# EAGLE board commadorable64-22-v1 (EAGLE 6.5.0)
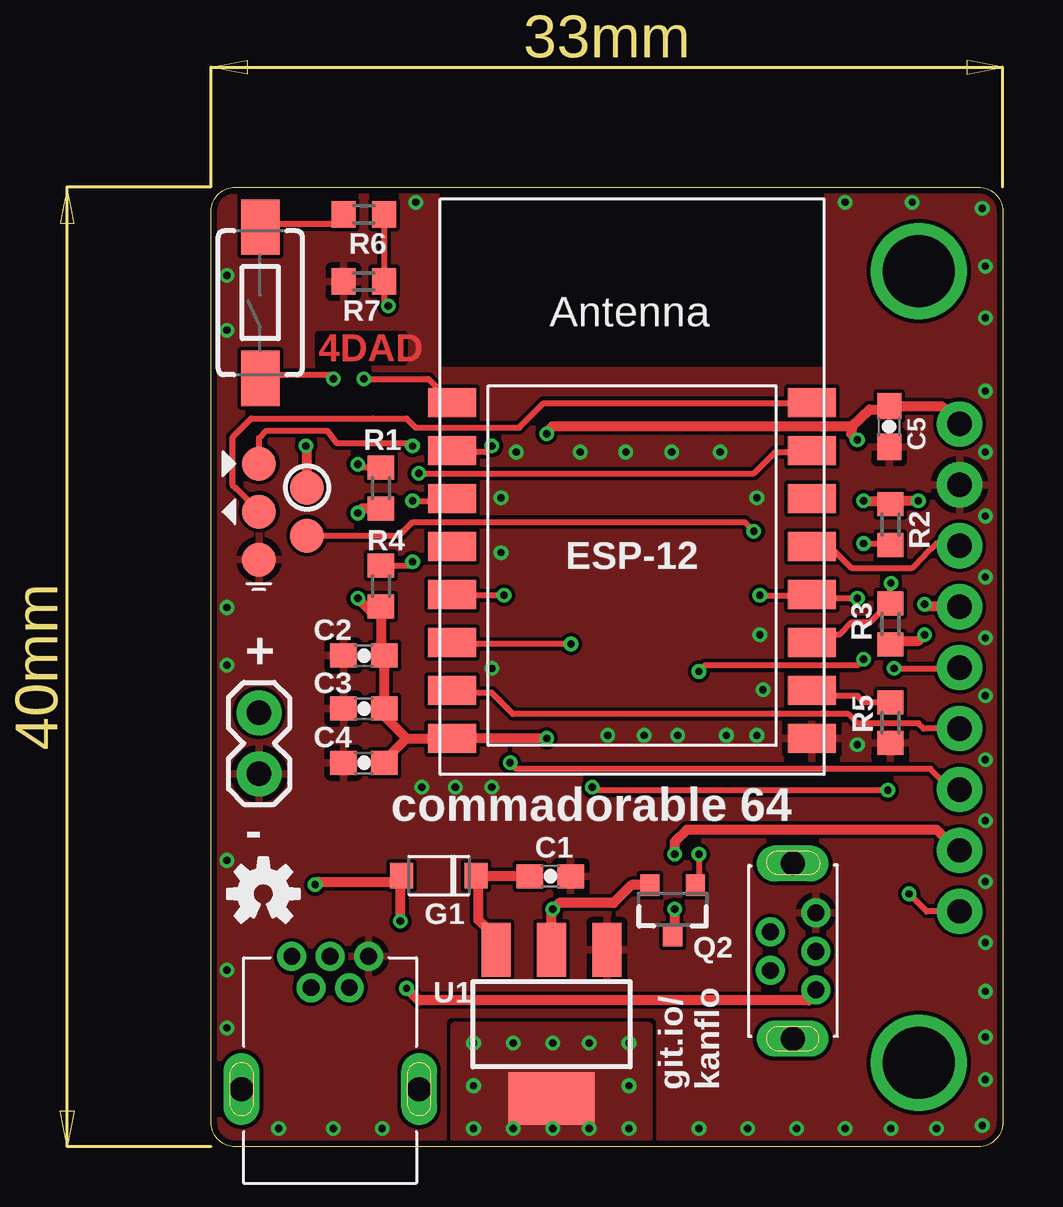
[diagram p0: board, top side]
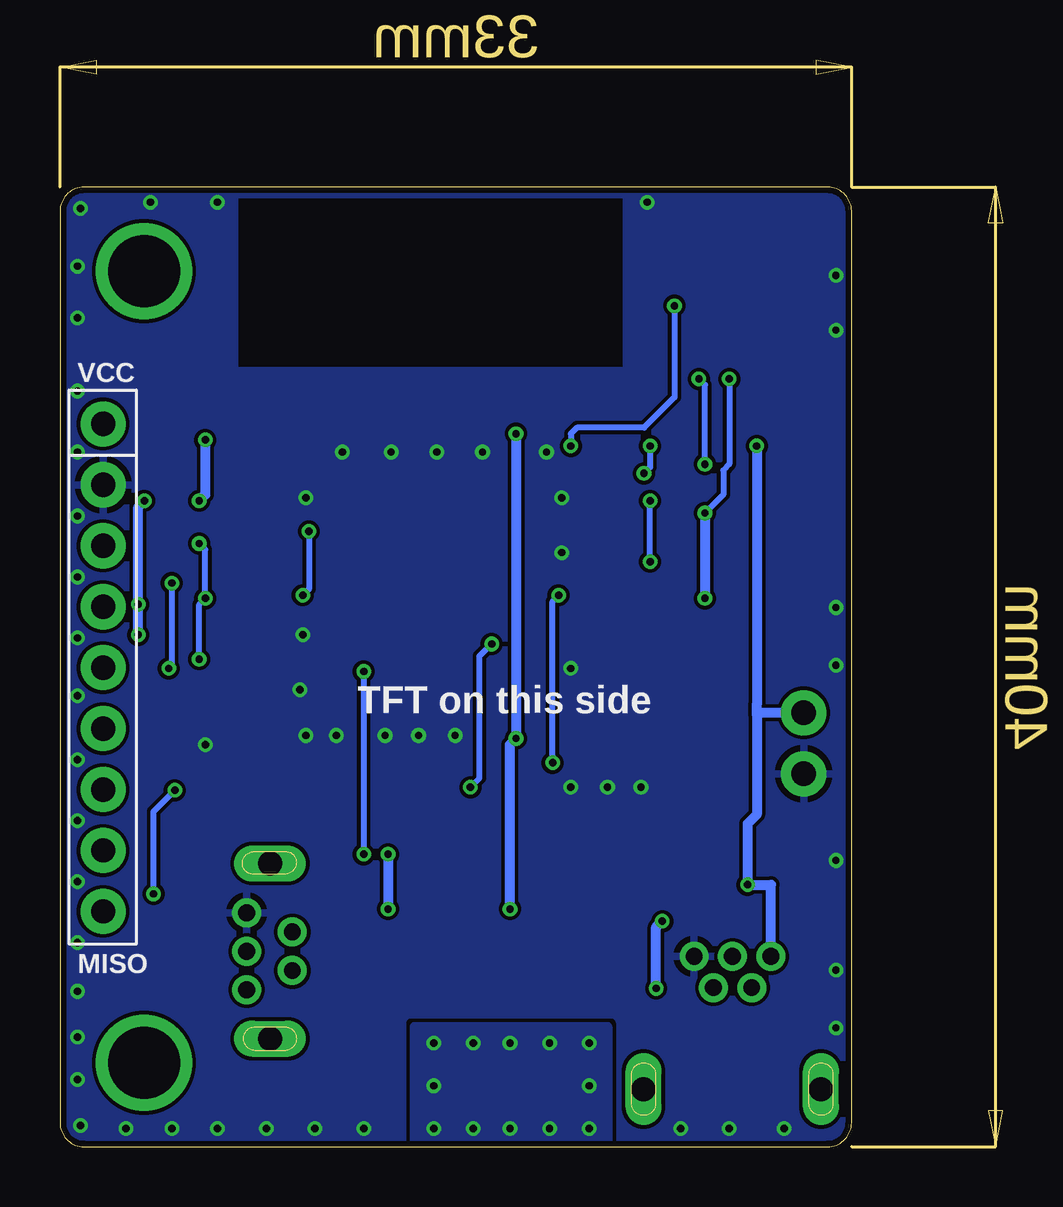
[diagram p1: board, bottom side, seen from below]

Size 33 x 40 mm. Coordinates in mm from the lower left corner, seen from the top.
Outline: 33,39 33,1 arc-90 32,0 1,0 arc-90 0,1 0,39 arc-90 1,40 32,40 arc-90 33,39
Copper layers (1*16): Top 0.035mm / dielectric 1.5mm / Bottom 0.035mm
Design rules "current": minimum track width 6mil, minimum drill 12mil, track to track 6mil, track to pad 6mil, pad to pad 6mil, via to via 6mil, smd to smd 0mil, copper to edge 10mil, drill to drill 10mil, minimum pad ring 10mil, minimum via ring 6mil, stop-mask expansion 2mil, vias tented up to drill 100mil, thermal gap 10mil

## Footprints (pad centres in the part's own frame; a part is rotated, then mirrored left to right if it is on the bottom)
0603-CAP = smd 1.1 x 1: 1 -0.85,0; 2 0.85,0
SOD-123FL = smd 0.95 x 1.05: A -1.6,0; C 1.5,0
SPI_DISPLAY = drill 1.016 pad 1.88: CS -5.08,3.81; D/C -5.08,-1.27; GND -5.08,6.35; LED -5.08,-8.89; MISO -5.08,-11.43; MOSI -5.08,-3.81; RESET -5.08,1.27; SCK -5.08,-6.35; VCC -5.08,8.89
1X02 = drill 1.016 pad 1.88: 1 0,0; 2 2.54,0
SOT23-3 = smd 0.8 x 0.9: 1 -0.95,-1; 2 0.95,-1; 3 0,1.1
R0603 = smd 1 x 1.1: 1 -0.85,0; 2 0.85,0
TACTILE-SWITCH-1101NE = smd 2.3 x 1.6: 1 -3.15,0; 2 3.15,0
SOT223 = smd 1.219 x 2.235: 1 -2.311,-3.099; 2 0,-3.099; 3 2.311,-3.099 | smd 3.6 x 2.2: 4 0,3.099
ESP-12E = smd 2 x 1.2: 1 -7.5,4.5; 2 -7.5,2.5; 3 -7.5,0.5; 4 -7.5,-1.5; 5 -7.5,-3.5; 6 -7.5,-5.5; 7 -7.5,-7.5; 8 -7.5,-9.5; 9 7.5,-9.5; 10 7.5,-7.5; 11 7.5,-5.5; 12 7.5,-3.5; 13 7.5,-1.5; 14 7.5,0.5; 15 7.5,2.5; 16 7.5,4.5
MICRO_USB_TH = drill 0.7: D+ -0.11,4.73; D- -0.91,3.43; GND 1.49,4.73; ID 0.69,3.43; VBUS -1.71,4.73 | drill 1 pad 1.5 long: P$1 -3.8,-0.8; P$2 3.6,-0.8
MICRO_USB_TH_VERTICAL = drill 0.7: D+ -0.16,-1.27; D- -0.96,0.63; GND 1.44,-1.27; ID 0.65,0.63; VBUS -1.76,-1.27 | drill 1 pad 1.5 long: P$1 -3.8,-0.3; P$2 3.5,-0.3
ESPROG = smd 1.422 x 1.422: GND -1,-2; GPIO0 1,-1; RXI -1,2; TXO -1,0; VCC 1,1

## Placement (x,y rotation side)
C1  1uF  [0603-CAP]  14.14,11.28 0 top
C2  0.1uF  [0603-CAP]  6.37,20.47 180 top
C3  1uF  [0603-CAP]  6.37,18.26 180 top
C4  10uF  [0603-CAP]  6.37,16 180 top
C5  0.1uF  [0603-CAP]  28.26,30.02 270 top
G1  DIODE-SCHOTTKYSOD-123FL  [SOD-123FL]  9.54,11.3 0 top
J2  SPI_TFT_DISPLAY  [SPI_DISPLAY]  26.12,21.24 0 bottom
JP1  [1X02]  2,15.54 90 top
Q2  MOSFET-PCHANNEL  [SOT23-3]  19.25,9.91 180 top
R1  4k7  [R0603]  7.08,27.46 270 top
R2  4k7  [R0603]  28.31,25.93 90 top
R3  4k7  [R0603]  28.31,21.79 270 top
R4  4k7  [R0603]  7.08,23.37 270 top
R5  4k7  [R0603]  28.31,17.68 270 top
R6  220k  [R0603]  6.37,38.86 180 top
R7  100k  [R0603]  6.37,36.07 0 top
S1  SWITCH-MOMENTARY-2SMD-1101NE  [TACTILE-SWITCH-1101NE]  2.05,35.18 90 top
U1  NCP1117  [SOT223]  14.19,5.11 180 top
U2  [ESP-12E]  17.54,26.52 0 top
U$1  [OSHW-LOGO-S]  2.18,10.54 0 top
X1  MICRO_USB_TH  [MICRO_USB_TH]  5.07,3.2 0 top
X2  MICRO_USB_TH_VERTICAL  [MICRO_USB_TH_VERTICAL]  23.94,8.31 90 top
X3  ESPROGESPROG-DEVICE  [ESPROG]  3,26.48 0 top

## Library data of the parts
C1-C5 = SparkFun-Capacitors
G1 J2 U2 X1-X3 = kanflo
JP1 = SparkFun-Connectors
Q2 = SparkFun-DiscreteSemi; PROD_ID: TRANS-08285
R1-R7 = resistor
S1 = SparkFun-Electromechanical; PROD_ID: SWCH-00815
U1 = ELL-i-PowerIC
U$1 = SparkFun-Aesthetics

## Nets
ADC/USR_BTN: R6.1 R7.2 U2.2
CH_PD: R4.1 U2.3
GND: C1.2 C2.2 C3.2 C4.2 C5.2 J2.GND JP1.1 R5.2 R7.1 U1.1 U2.9 X1.GND X2.GND X3.GND
GPIO0/TFT_BL_EN: Q2.1 R2.1 U2.12 X3.GPIO0
GPIO2/TFT_DC: J2.D/C R3.1 U2.11
GPIO4/TFT_CS: J2.CS U2.13
GPIO5: U2.14
GPIO12/MISO: J2.MISO U2.6
GPIO13/MOSI: J2.MOSI U2.7
GPIO14/SCK: J2.SCK U2.5
GPIO15: R5.1 U2.10
GPIO16: U2.4
LED_VCC: J2.LED Q2.3
N$1: C1.1 G1.C U1.3
N$4: R6.2 S1.2
RST: R1.1 U2.1
RXI: U2.15 X3.RXI
TAB: U1.4
TXO: U2.16 X3.TXO
VCC: C2.1 C3.1 C4.1 C5.1 J2.RESET J2.VCC Q2.2 R1.2 R2.2 R3.2 R4.2 S1.1 U1.2 U2.8
VIN: G1.A JP1.2 X1.VBUS X2.VBUS X3.VCC

## Tracks (layer width: path | path; a pad name or v marks a point on that pad's centre or on a via)
ADC/USR_BTN  (via drill 0.3 pad 0.25)
  Top 0.254: R6.1 R7.2 7.22,35.22 v7.38,35.05 | v11.7,29.21 11.45,28.96 10.11,28.96 U2.2
  Bottom 0.254: v7.38,35.05 7.38,31.24 8.65,29.97 11.45,29.97 11.7,29.72 v11.7,29.21
CH_PD  (via drill 0.3 pad 0.25)
  Top 0.254: R4.1 8.23,24.22 v8.4,24.38 | v8.4,26.92 9.95,26.92 U2.3
  Bottom 0.254: v8.4,24.38 v8.4,26.92
GND  (via drill 0.3 pad 0.25)
  other vias: 32.28,28.96 32.28,26.29 32.28,23.75 32.28,21.21 32.28,18.8 32.28,16.13 32.28,13.59 32.28,11.05 32.28,8.51 32.28,6.48 32.28,4.57 32.15,0.89 32.28,2.79 30.24,0.76 28.34,0.76 26.43,0.76 24.4,0.76 22.37,0.76 20.34,0.76 7.13,0.76 5.1,0.76 2.81,0.76 0.65,4.95 0.65,7.37 0.65,11.94 0.65,20.07 0.65,22.48 0.65,34.04 0.65,36.32 8.53,39.37 26.43,39.37 32.15,39.12 29.23,39.37 32.28,36.7 32.28,34.54 32.28,31.5 8.78,14.99 10.18,14.99 11.7,14.99 22.75,17.14 21.48,17.14 26.94,16.76 22.88,21.34 23.01,19.05 22.75,27.05 12.08,27.05 12.08,24.77 11.7,19.94 19.45,17.14 18.05,17.14 16.53,17.14 15.38,28.96 12.72,28.96 17.29,28.96 19.2,28.96 21.23,28.96
  pour Top (rank 6): 0,40 33,40 33,0 0,0
  pour Bottom (rank 6): 0,40 33,40 33,0 0,0
GPIO0/TFT_BL_EN  (via drill 0.3 pad 0.25)
  Top 0.254: v26.94,22.86 25.2,22.86 U2.12 25.01,22.99 v22.88,22.99 | v27.2,25.15 28.25,25.15 R2.1 | X3.GPIO0 7.84,25.48 8.4,26.04 22.24,26.04 v22.62,25.65 | v27.2,20.32 26.94,20.07 20.59,20.07 v20.34,19.81 | v20.34,12.19 20.34,11.05 Q2.1
  Bottom 0.254: v27.2,20.32 27.2,22.61 v26.94,22.86 26.94,24.89 v27.2,25.15 | v22.62,25.65 22.62,23.24 v22.88,22.99 | v20.34,19.81 v20.34,12.19
GPIO2/TFT_DC  (via drill 0.3 pad 0.25)
  Top 0.254: U2.11 25.36,21.34 26.18,21.34 26.69,21.84 27.45,21.84 28.25,22.64 R3.1 28.31,23.47 v28.34,23.5 | v28.47,19.94 31.17,19.94 J2.D/C
  Bottom 0.254: v28.34,23.5 28.34,20.07 v28.47,19.94
GPIO4/TFT_CS
  Top 0.254: U2.13 25.8,25.02 26.69,24.13 29.23,24.13 29.74,24.64 30.24,25.15 31.1,25.15 J2.CS
GPIO12/MISO  (via drill 0.3 pad 0.25)
  Top 0.254: J2.MISO 29.83,9.81 v29.1,10.54 | v28.21,14.86 16.02,14.86 v15.89,14.99 | v15,20.95 10.11,20.95 U2.6
  Bottom 0.254: v29.1,10.54 29.1,13.97 v28.21,14.86 | v15.89,14.99 15.51,15.37 15.51,20.45 v15,20.95
GPIO13/MOSI
  Top 0.254: J2.MOSI 29.7,17.43 29.48,17.65 26.94,17.65 26.56,18.03 12.59,18.03 11.7,18.92 10.14,18.92 U2.7
GPIO14/SCK  (via drill 0.3 pad 0.25)
  Top 0.254: J2.SCK 30.85,14.89 29.99,15.75 12.72,15.75 v12.46,16 | v12.21,22.99 10.07,22.99 U2.5
  Bottom 0.254: v12.46,16 12.46,22.73 v12.21,22.99
GPIO15
  Top 0.254: R5.1 27.21,18.53 26.94,18.8 25.27,18.8 U2.10
LED_VCC  (via drill 0.3 pad 0.25)
  Top 0.406: J2.LED 31.1,12.35 30.24,13.21 19.83,13.21 19.32,12.7 v19.32,12.19 | v19.32,9.91 19.32,8.88 Q2.3
  Bottom 0.406: v19.32,12.19 v19.32,9.91
N$1
  Top 0.406: U1.3 11.7,8.38 11.7,8.89 11.14,9.45 11.14,11.2 G1.C 11.35,11.3 11.37,11.28 C1.1
N$2  (via drill 3)
  other vias: 29.5,36.5
N$3  (via drill 3)
  other vias: 29.5,3.5
N$4
  Top 0.254: R6.2 5.11,38.46 2.58,38.46 2.56,38.48 2.2,38.48 S1.2
RST  (via drill 0.3 pad 0.25)
  Top 0.254: R1.1 6.25,28.31 v6.11,28.45 | v6.37,32 9.06,32 U2.1
  Bottom 0.254: v6.11,28.45 6.11,31.75 v6.37,32
RXI  (via drill 0.3 pad 0.25)
  Top 0.254: X3.RXI 2,29.54 2.3,29.84 4.84,29.84 5.23,29.34 8.27,29.34 v8.4,29.21 | 24.98,28.96 U2.15 24.98,28.96 | v8.65,28.07 22.62,28.07 23.51,28.96 24.98,28.96
  Bottom 0.254: v8.4,29.21 8.4,28.32 v8.65,28.07
TAB  (via drill 0.3 pad 0.25)
  other vias: 10.94,2.54 10.94,0.76 10.94,4.32 12.59,4.32 17.42,4.32 14.24,4.32 15.77,4.32 17.42,2.54 17.42,0.76 15.77,0.76 14.24,0.76 12.59,0.76
  pour Top (no thermals): 10.18,0 18.2,0 18.2,5 10.18,5
  pour Bottom: 10.18,0 18.2,0 18.2,5 10.18,5
TXO
  Top 0.254: X3.TXO 1.03,27.43 0.91,27.56 0.91,29.59 1.29,29.97 1.67,30.35 6.75,30.35 8.15,30.35 8.53,29.97 12.84,29.97 13.86,30.99 25.01,30.99 U2.16
VCC  (via drill 0.3 pad 0.25)
  Top 0.254: v5.1,32 4.95,32.16 2.18,32.16 S1.1
  Top 0.406: U1.2 14.19,9.86 v14.24,9.91 14.5,10.16 16.78,10.16 17.53,10.91 Q2.2 | v13.99,17.02 U2.8 | U2.8 | C4.1 7.22,16.09 8.15,17.02 | 8.15,17.02 U2.8 | U2.8 | 8.15,17.02 7.22,17.95 C3.1 C2.1 7.08,20.61 R4.2 6.91,22.35 6.62,22.35 v6.11,22.86 | 26.71,30.02 22.65,30.02 14.22,30.02 v13.99,29.72 | 26.71,30.02 26.69,29.72 v26.94,29.46 | v27.2,26.92 28.17,26.92 R2.2 28.45,26.92 v29.48,26.92 | 30.91,22.51 J2.RESET 29.83,22.51 v29.74,22.61 | R3.2 28.45,21.08 29.48,21.08 v29.74,21.34 | R1.2 6.3,26.61 v6.11,26.42 | C5.1 | 26.71,30.02 27.45,30.73 28.12,30.73 C5.1 | C5.1 30.46,30.87 J2.VCC
  Bottom 0.254: v5.1,32 5.1,28.45 5.35,28.19 5.35,27.18 v6.11,26.42
  Bottom 0.406: v14.24,9.91 14.24,16.76 v13.99,17.02 v13.99,29.72 | v26.94,29.46 26.94,27.18 v27.2,26.92 | v29.48,26.92 29.74,26.67 v29.74,22.61 v29.74,21.34 | v6.11,26.42 v6.11,22.86
VIN  (via drill 0.3 pad 0.25)
  Top 0.406: X3.VCC 4,29.16 v3.95,29.21 | v4.34,10.92 4.46,11.05 7.69,11.05 G1.A 7.94,10.95 7.89,10.9 v7.89,9.4 | v8.15,6.6 8.65,6.1 10.94,6.1 24.91,6.1 25.22,6.4 X2.VBUS
  Bottom 0.406: X1.VBUS 3.36,10.92 v4.34,10.92 4.34,13.46 3.95,13.84 3.95,18.03 | 3.95,18.03 3.95,18.41 v3.95,29.21 | v8.15,6.6 8.15,9.14 v7.89,9.4 | JP1.2 3.9,18.09 3.95,18.03

## Text on the board
Top: 4DAD
tNames: ESP-12 | + | - | commadorable 64 | git.io/ / kanflo
bNames: VCC | TFT on this side | MISO